# Altium PCB BOCD_1_02_Daughter_NBP2.PcbDoc (part 1 of 2)
Units mil, origin at the board's own origin, x right, y up, seen from the top; angles counter-clockwise.
Board outline 2716.51 x 3188.78 mil, 2 copper layers (Top Layer, Bottom Layer); 52 components, 189 nets, 558 pads, 192 vias.
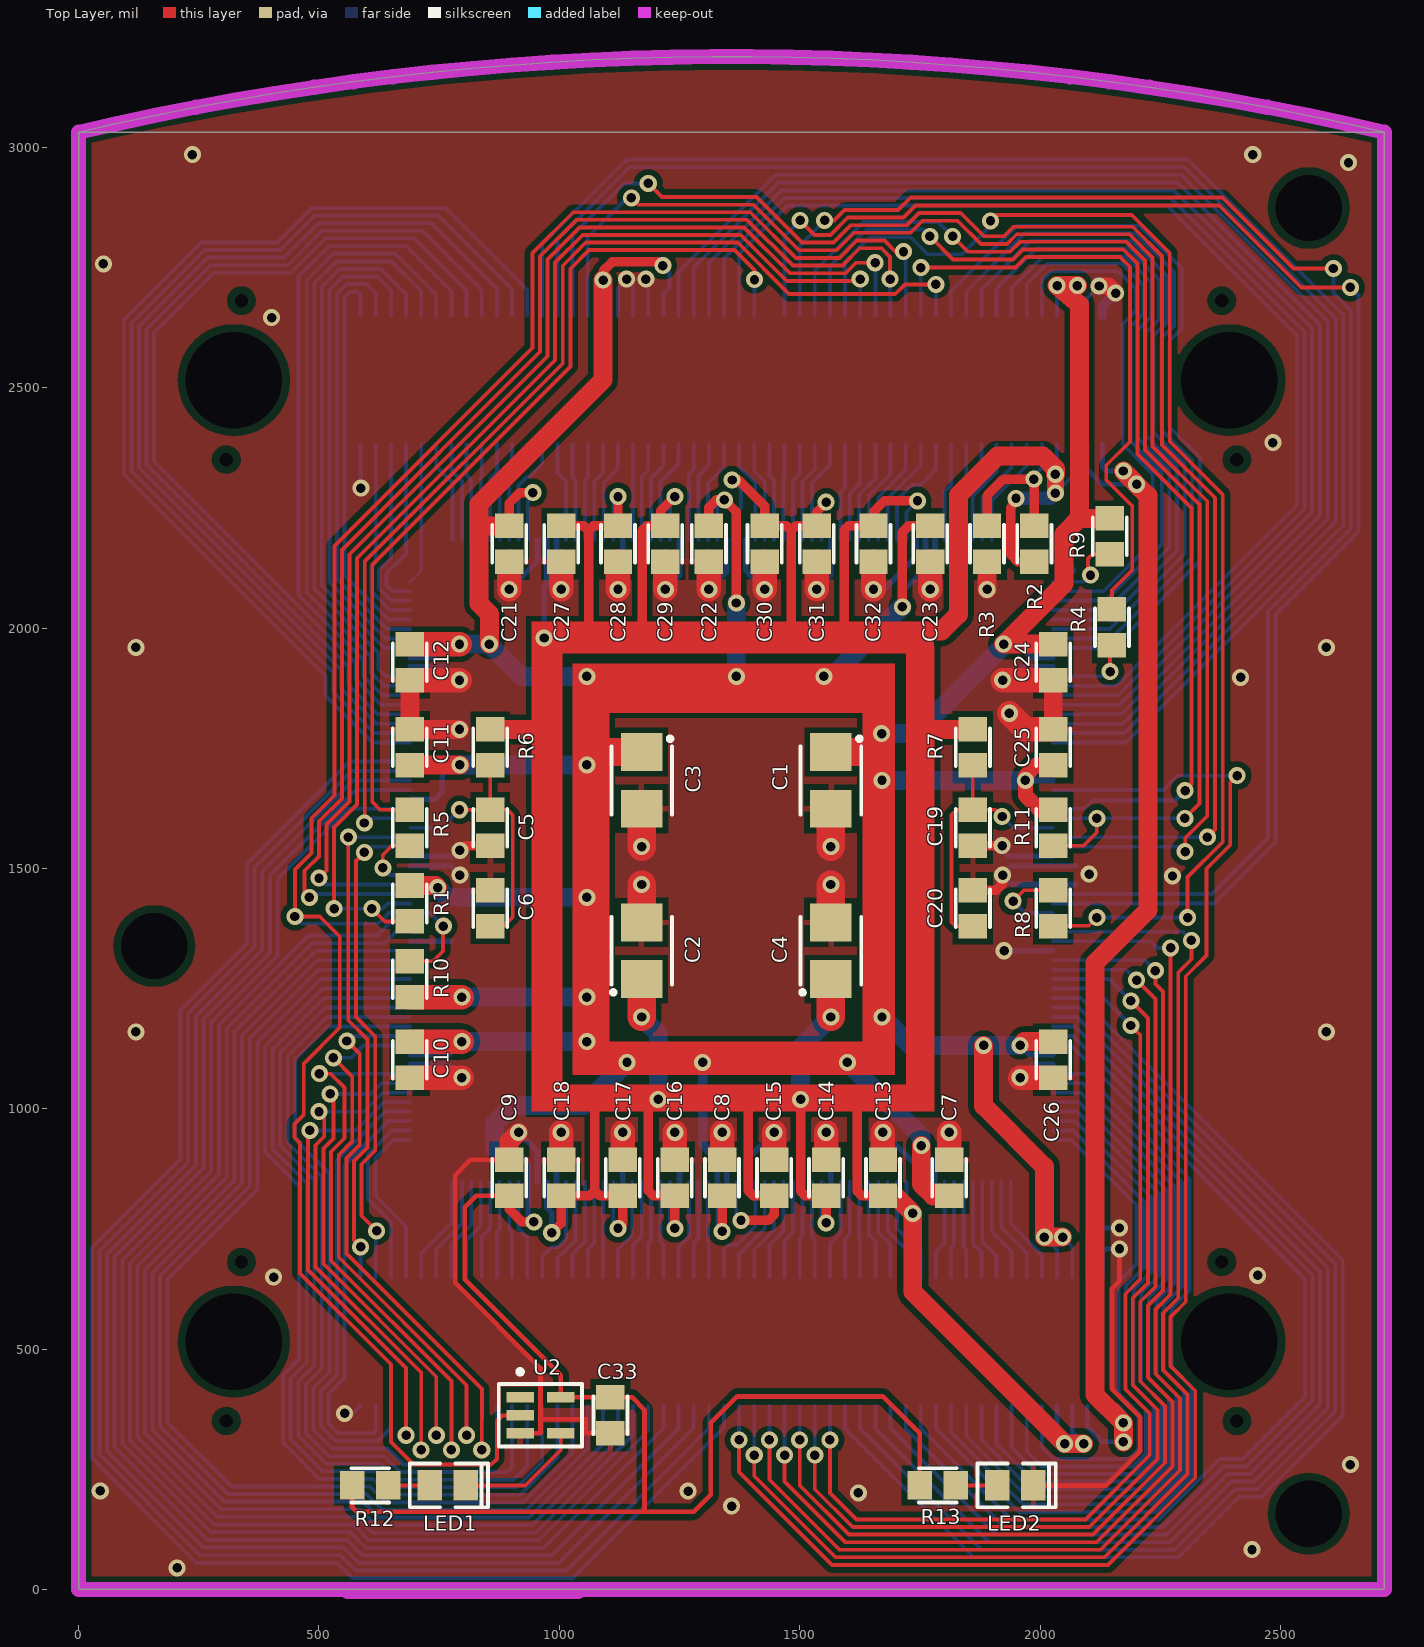
[diagram p0: Top Layer view]
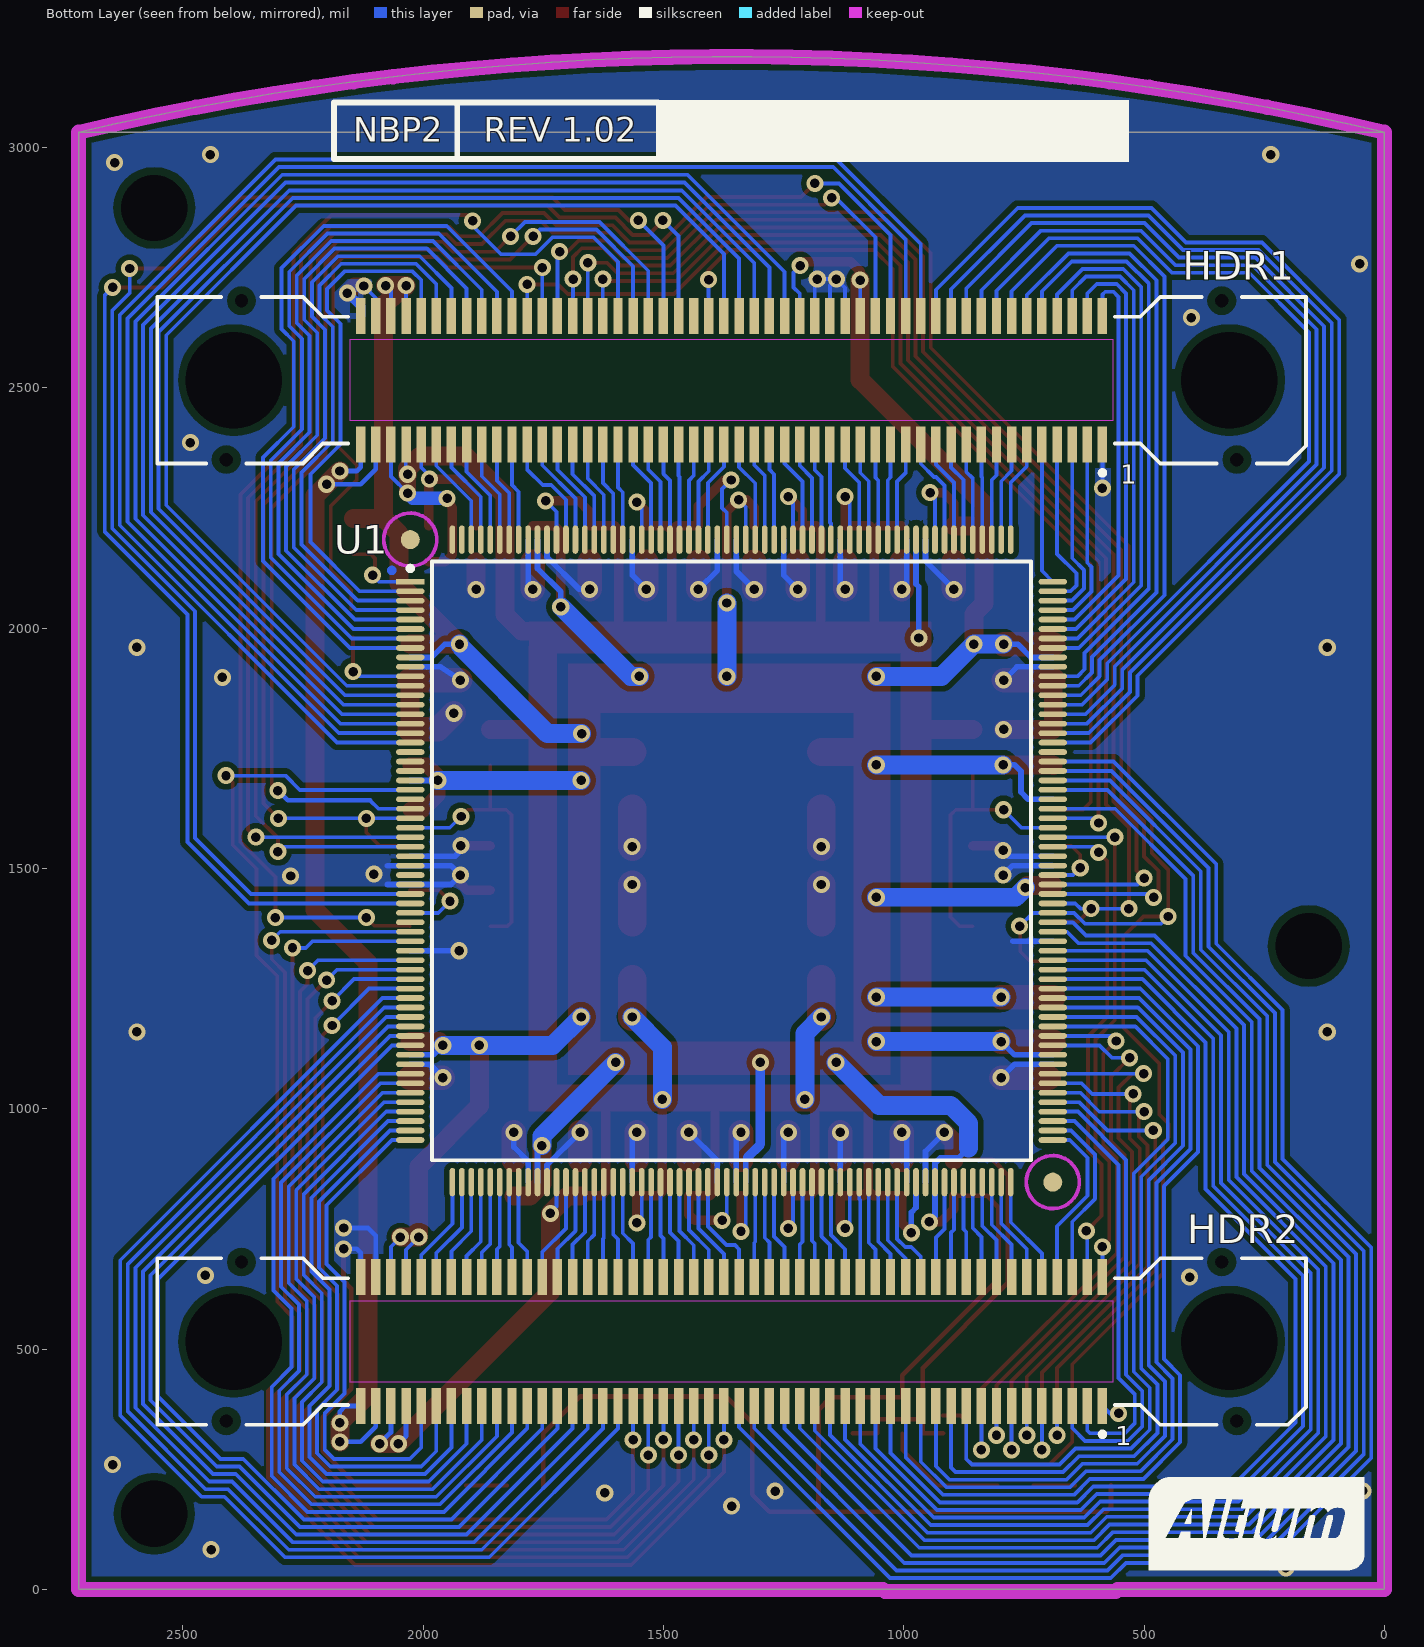
[diagram p1: Bottom Layer view, seen from below]

## Layer stack, top to bottom
Top Layer: signal copper 1.4
Dielectric: core 12.6, FR-4, Dk 4.8
Bottom Layer: signal copper 1.4

## Board outline
0.01,0.01 0.01,3031.49 ccw(c0.02,3031.5) 0.03,3031.48 cw(c1358.27,-2748.05) 0.03,3031.48 2716.52,3031.48 2716.52,0.01

## Design rules (kind name [scope] priority, off if disabled: settings)
Clearance Clearance_Unplated_Pads [PadIsPlated = 'False'] p1: gap=15.75 // Slightly larger clearance around unplated holes
Clearance Clearance_Polygons [InPolygon] p2: gap=11.81
Clearance [All] p3: gap=7.87
ComponentClearance [All] p1: gap=7.87 collisioncheckmode=3 verticalgap=10 showdistances=FALSE
FabricationTestPointUsage TestPointUsage [All] p1 off: valid=0 allowmultiple=FALSE
FabricationTestpoint Testpoint [All] p1 off: side=3 testpointundercomponent=TRUE minsize=40 maxsize=100 preferedsize=60 minholesize=0 maxholesize=40 preferedholesize=32 testpointgrid=1 allowsidetop=TRUE allowsidebottom=TRUE usegrid=TRUE gridtolerance=0.01
HoleSize [All] p1: absolutevalues=TRUE maxlimit=204.72 minlimit=15.75 maxpercent=80.000 minpercent=20.000
PlaneClearance [All] p1: clearance=19.68
PlaneConnect [All] p1: planeconnectstyle=Relief reliefexpansion=19.68 reliefentries=4 reliefconductorwidth=9.84 reliefairgap=9.84
PolygonConnect PolygonConnect_Satellite_ID_Pads [InPadClass('Satellite ID Pads')] p1: connectstyle=NoConnect reliefconductorwidth=10 reliefentries=4 polygonreliefangle="90 Angle"
PolygonConnect [All] p2: connectstyle=Relief reliefconductorwidth=11.81 reliefentries=4 polygonreliefangle="90 Angle"
RoomDefinition BOCD_CycloneEPC12 [InComponentClass('BOCD_CycloneEPC12')] p1 off: confinementstyle=ConfineIn formatcopy=TRUE lockcomponents=FALSE outline 0,0 2716.54,0 2716.54,3031.5 0,3031.5
RoutingVias [All] p1: holewidth=19.68 width=35.43 viastyle="Through Hole" minholewidth=19.68 minwidth=35.43 maxholewidth=19.68 maxwidth=35.43
SilkscreenOverComponentPads [All] p1: minsilkscreentomaskgap=10
SolderMaskExpansion SolderMaskExpansion_Vias [Isvia] p1: expansion=-18.11
SolderMaskExpansion [All] p2: expansion=3.94
Width Width_Power_Nets [InNetClass('Power Nets')] p1: maxlimit=98.43 minlimit=5.91 preferedwidth=9.84 toplayer_prefwidth=5.91
Width [All] p2: maxlimit=59.06 minlimit=7.87 preferedwidth=7.87
21 further rules are at their usual default settings.

## Classes and differential pairs
net class "Power Nets": 5V GND VCC VCCINT
pad class "Satellite ID Pads": HDR1-36 HDR1-38 HDR1-40

## Components (designator, comment, footprint, x,y, rotation, side; value= is the part's Value field where it differs from the comment)
C1 "10uF" MCCT-B 1564.96,1683.07 r270 top
C2 "10uF" MCCT-B 1171.26,1328.74 r90 top
C3 "10uF" MCCT-B 1171.26,1683.07 r270 top
C4 "10uF" MCCT-B 1564.96,1328.74 r90 top
C5 "0.1uF" CC2012-0805 856.3,1584.65 r270 top
C6 "0.001uF" CC2012-0805 856.3,1417.32 r90 top
C7 "0.1uF" CC2012-0805 1811.02,856.3 r90 top
C8 "0.1uF" CC2012-0805 1338.58,856.3 r90 top
C9 "0.1uF" CC2012-0805 895.67,856.3 r90 top
C10 "0.1uF" CC2012-0805 688.98,1102.36 r270 top
C11 "0.1uF" CC2012-0805 688.98,1751.97 r90 top
C12 "0.1uF" CC2012-0805 688.98,1929.13 r270 top
C13 "0.1uF" CC2012-0805 1673.23,856.3 r90 top
C14 "0.1uF" CC2012-0805 1555.12,856.3 r90 top
C15 "0.1uF" CC2012-0805 1446.85,856.3 r90 top
C16 "0.1uF" CC2012-0805 1240.16,856.3 r90 top
C17 "0.1uF" CC2012-0805 1131.89,856.3 r90 top
C18 "0.1uF" CC2012-0805 1003.94,856.3 r90 top
C19 "0.1uF" CC2012-0805 1860.24,1584.65 r90 top
C20 "0.001uF" CC2012-0805 1860.24,1417.32 r270 top
C21 "0.1uF" CC2012-0805 895.67,2175.2 r90 top
C22 "0.1uF" CC2012-0805 1311.02,2175.2 r90 top
C23 "0.1uF" CC2012-0805 1771.65,2175.2 r90 top
C24 "0.1uF" CC2012-0805 2027.56,1929.13 r90 top
C25 "0.1uF" CC2012-0805 2027.56,1751.97 r270 top
C26 "0.1uF" CC2012-0805 2027.56,1102.36 r90 top
C27 "0.1uF" CC2012-0805 1003.94,2175.2 r90 top
C28 "0.1uF" CC2012-0805 1122.05,2175.2 r90 top
C29 "0.1uF" CC2012-0805 1220.47,2175.2 r90 top
C30 "0.1uF" CC2012-0805 1427.17,2175.2 r90 top
C31 "0.1uF" CC2012-0805 1535.43,2175.2 r90 top
C32 "0.1uF" CC2012-0805 1653.54,2175.2 r90 top
C33 "0.1uF" CC2012-0805 1106.3,362.2 r270 top
HDR1 "54075-1009" 54075 1358.27,2515.75 r0 bottom locked
HDR2 "54075-1009" 54075 1358.27,515.75 r0 bottom locked
LED1 "HSMG-C170" "SMD _LED" 767.72,216.54 r180 top locked
LED2 "HSMH-C170" "SMD _LED" 1948.82,216.54 r180 top locked
R1 "4K7" CC2012-0805 688.98,1427.17 r270 top
R2 "DO NOT INSTALL" CC2012-0805 1988.19,2175.2 r90 top
R3 "47R" CC2012-0805 1889.76,2175.2 r270 top
R4 "100R" CC2012-0805 2149.61,2001.97 r90 top
R5 "100R" CC2012-0805 688.98,1584.65 r270 top
R6 "1R" CC2012-0805 856.3,1751.97 r270 top
R7 "1R" CC2012-0805 1860.24,1751.97 r270 top
R8 "33R" CC2012-0805 2027.56,1417.32 r270 top
R9 "4K7" CC2012-0805 2145,2191 r270 top
R10 "4K7" CC2012-0805 688.98,1269.69 r90 top
R11 "4K7" CC2012-0805 2027.56,1584.65 r270 top
R12 "270R" CC2012-0805 606.3,216.54 r0 top
R13 "270R" CC2012-0805 1787.4,216.54 r0 top
U1 "Cyclone EP1C12Q240C8" F-QFP32X32-G240/P.5N(RS) 1358.27,1515.75 r180 bottom locked
U2 "SN74LVC1G04DBV" SO-G5/P.95 960.63,362.2 r270 top

## Footprints (in the part's own frame and the unit in brackets; to place one, negate y for a bottom-side part, rotate by r counter-clockwise, add the part's x,y. Pads: shape width x height; smd on the part's side, far side on the other; paste and mask are expansions set on the pad)
54075 [mm] "Connector; Docking Station, Receptacle; 100 Position; Vertical"
  rect 0.5x1.9 smd: 1(-19.6,3.4) 2(-19.6,-3.4) 3(-18.8,3.4) 4(-18.8,-3.4) 5(-18,3.4) 6(-18,-3.4) 7(-17.2,3.4) 8(-17.2,-3.4) 9(-16.4,3.4) 10(-16.4,-3.4) 11(-15.6,3.4) 12(-15.6,-3.4) 13(-14.8,3.4) 14(-14.8,-3.4) 15(-14,3.4) 16(-14,-3.4) 17(-13.2,3.4) 18(-13.2,-3.4) 19(-12.4,3.4) 20(-12.4,-3.4) 21(-11.6,3.4) 22(-11.6,-3.4) 23(-10.8,3.4) 24(-10.8,-3.4) 25(-10,3.4) 26(-10,-3.4) 27(-9.2,3.4) 28(-9.2,-3.4) 29(-8.4,3.4) 30(-8.4,-3.4) 31(-7.6,3.4) 32(-7.6,-3.4) 33(-6.8,3.4) 34(-6.8,-3.4) 35(-6,3.4) 36(-6,-3.4) 37(-5.2,3.4) 38(-5.2,-3.4) 39(-4.4,3.4) 40(-4.4,-3.4) 41(-3.6,3.4) 42(-3.6,-3.4) 43(-2.8,3.4) 44(-2.8,-3.4) 45(-2,3.4) 46(-2,-3.4) 47(-1.2,3.4) 48(-1.2,-3.4) 49(-0.4,3.4) 50(-0.4,-3.4) 51(0.4,3.4) 52(0.4,-3.4) 53(1.2,3.4) 54(1.2,-3.4) 55(2,3.4) 56(2,-3.4) 57(2.8,3.4) 58(2.8,-3.4) 59(3.6,3.4) 60(3.6,-3.4) 61(4.4,3.4) 62(4.4,-3.4) 63(5.2,3.4) 64(5.2,-3.4) 65(6,3.4) 66(6,-3.4) 67(6.8,3.4) 68(6.8,-3.4) 69(7.6,3.4) 70(7.6,-3.4) 71(8.4,3.4) 72(8.4,-3.4) 73(9.2,3.4) 74(9.2,-3.4) 75(10,3.4) 76(10,-3.4) 77(10.8,3.4) 78(10.8,-3.4) 79(11.6,3.4) 80(11.6,-3.4) 81(12.4,3.4) 82(12.4,-3.4) 83(13.2,3.4) 84(13.2,-3.4) 85(14,3.4) 86(14,-3.4) 87(14.8,3.4) 88(14.8,-3.4) 89(15.6,3.4) 90(15.6,-3.4) 91(16.4,3.4) 92(16.4,-3.4) 93(17.2,3.4) 94(17.2,-3.4) 95(18,3.4) 96(18,-3.4) 97(18.8,3.4) 98(18.8,-3.4) 99(19.6,3.4) 100(19.6,-3.4)
  round 0.5 hole 0.7 unplated: MH1(-26.7,4.2) MH2(-25.9,-4.2) MH3(26.7,4.2) MH4(25.9,-4.2)
  round 4.8 hole 5.1 unplated: MH5(-26.3,0) MH6(26.3,0)
  Top Layer keep-out region: -20.15,2.15 20.15,2.15 20.15,-2.15 -20.15,-2.15
  silkscreen extent -30.35,-4.4 30.35,5.02
CC2012-0805 [mm]
  rect 1.3x1.5 smd: 1(-0.95,0) 2(0.95,0)
  silkscreen extent -1,-0.9 1,0.9
F-QFP32X32-G240/P.5N(RS) [mm]
  rect 1.5x0.3 smd: 1(-16.975,14.75)
  oval 1.5x0.3 smd: 2(-16.975,14.25) 3(-16.975,13.75) 4(-16.975,13.25) 5(-16.975,12.75) 6(-16.975,12.25) 7(-16.975,11.75) 8(-16.975,11.25) 9(-16.975,10.75) 10(-16.975,10.25) 11(-16.975,9.75) 12(-16.975,9.25) 13(-16.975,8.75) 14(-16.975,8.25) 15(-16.975,7.75) 16(-16.975,7.25) 17(-16.975,6.75) 18(-16.975,6.25) 19(-16.975,5.75) 20(-16.975,5.25) 21(-16.975,4.75) 22(-16.975,4.25) 23(-16.975,3.75) 24(-16.975,3.25) 25(-16.975,2.75) 26(-16.975,2.25) 27(-16.975,1.75) 28(-16.975,1.25) 29(-16.975,0.75) 30(-16.975,0.25) 31(-16.975,-0.25) 32(-16.975,-0.75) 33(-16.975,-1.25) 34(-16.975,-1.75) 35(-16.975,-2.25) 36(-16.975,-2.75) 37(-16.975,-3.25) 38(-16.975,-3.75) 39(-16.975,-4.25) 40(-16.975,-4.75) 41(-16.975,-5.25) 42(-16.975,-5.75) 43(-16.975,-6.25) 44(-16.975,-6.75) 45(-16.975,-7.25) 46(-16.975,-7.75) 47(-16.975,-8.25) 48(-16.975,-8.75) 49(-16.975,-9.25) 50(-16.975,-9.75) 51(-16.975,-10.25) 52(-16.975,-10.75) 53(-16.975,-11.25) 54(-16.975,-11.75) 55(-16.975,-12.25) 56(-16.975,-12.75) 57(-16.975,-13.25) 58(-16.975,-13.75) 59(-16.975,-14.25) 60(-16.975,-14.75) 121(16.975,-14.75) 122(16.975,-14.25) 123(16.975,-13.75) 124(16.975,-13.25) 125(16.975,-12.75) 126(16.975,-12.25) 127(16.975,-11.75) 128(16.975,-11.25) 129(16.975,-10.75) 130(16.975,-10.25) 131(16.975,-9.75) 132(16.975,-9.25) 133(16.975,-8.75) 134(16.975,-8.25) 135(16.975,-7.75) 136(16.975,-7.25) 137(16.975,-6.75) 138(16.975,-6.25) 139(16.975,-5.75) 140(16.975,-5.25) 141(16.975,-4.75) 142(16.975,-4.25) 143(16.975,-3.75) 144(16.975,-3.25) 145(16.975,-2.75) 146(16.975,-2.25) 147(16.975,-1.75) 148(16.975,-1.25) 149(16.975,-0.75) 150(16.975,-0.25) 151(16.975,0.25) 152(16.975,0.75) 153(16.975,1.25) 154(16.975,1.75) 155(16.975,2.25) 156(16.975,2.75) 157(16.975,3.25) 158(16.975,3.75) 159(16.975,4.25) 160(16.975,4.75) 161(16.975,5.25) 162(16.975,5.75) 163(16.975,6.25) 164(16.975,6.75) 165(16.975,7.25) 166(16.975,7.75) 167(16.975,8.25) 168(16.975,8.75) 169(16.975,9.25) 170(16.975,9.75) 171(16.975,10.25) 172(16.975,10.75) 173(16.975,11.25) 174(16.975,11.75) 175(16.975,12.25) 176(16.975,12.75) 177(16.975,13.25) 178(16.975,13.75) 179(16.975,14.25) 180(16.975,14.75)
  oval 0.3x1.5 smd: 61(-14.75,-16.975) 62(-14.25,-16.975) 63(-13.75,-16.975) 64(-13.25,-16.975) 65(-12.75,-16.975) 66(-12.25,-16.975) 67(-11.75,-16.975) 68(-11.25,-16.975) 69(-10.75,-16.975) 70(-10.25,-16.975) 71(-9.75,-16.975) 72(-9.25,-16.975) 73(-8.75,-16.975) 74(-8.25,-16.975) 75(-7.75,-16.975) 76(-7.25,-16.975) 77(-6.75,-16.975) 78(-6.25,-16.975) 79(-5.75,-16.975) 80(-5.25,-16.975) 81(-4.75,-16.975) 82(-4.25,-16.975) 83(-3.75,-16.975) 84(-3.25,-16.975) 85(-2.75,-16.975) 86(-2.25,-16.975) 87(-1.75,-16.975) 88(-1.25,-16.975) 89(-0.75,-16.975) 90(-0.25,-16.975) 91(0.25,-16.975) 92(0.75,-16.975) 93(1.25,-16.975) 94(1.75,-16.975) 95(2.25,-16.975) 96(2.75,-16.975) 97(3.25,-16.975) 98(3.75,-16.975) 99(4.25,-16.975) 100(4.75,-16.975) 101(5.25,-16.975) 102(5.75,-16.975) 103(6.25,-16.975) 104(6.75,-16.975) 105(7.25,-16.975) 106(7.75,-16.975) 107(8.25,-16.975) 108(8.75,-16.975) 109(9.25,-16.975) 110(9.75,-16.975) 111(10.25,-16.975) 112(10.75,-16.975) 113(11.25,-16.975) 114(11.75,-16.975) 115(12.25,-16.975) 116(12.75,-16.975) 117(13.25,-16.975) 118(13.75,-16.975) 119(14.25,-16.975) 120(14.75,-16.975) 181(14.75,16.975) 182(14.25,16.975) 183(13.75,16.975) 184(13.25,16.975) 185(12.75,16.975) 186(12.25,16.975) 187(11.75,16.975) 188(11.25,16.975) 189(10.75,16.975) 190(10.25,16.975) 191(9.75,16.975) 192(9.25,16.975) 193(8.75,16.975) 194(8.25,16.975) 195(7.75,16.975) 196(7.25,16.975) 197(6.75,16.975) 198(6.25,16.975) 199(5.75,16.975) 200(5.25,16.975) 201(4.75,16.975) 202(4.25,16.975) 203(3.75,16.975) 204(3.25,16.975) 205(2.75,16.975) 206(2.25,16.975) 207(1.75,16.975) 208(1.25,16.975) 209(0.75,16.975) 210(0.25,16.975) 211(-0.25,16.975) 212(-0.75,16.975) 213(-1.25,16.975) 214(-1.75,16.975) 215(-2.25,16.975) 216(-2.75,16.975) 217(-3.25,16.975) 218(-3.75,16.975) 219(-4.25,16.975) 220(-4.75,16.975) 221(-5.25,16.975) 222(-5.75,16.975) 223(-6.25,16.975) 224(-6.75,16.975) 225(-7.25,16.975) 226(-7.75,16.975) 227(-8.25,16.975) 228(-8.75,16.975) 229(-9.25,16.975) 230(-9.75,16.975) 231(-10.25,16.975) 232(-10.75,16.975) 233(-11.25,16.975) 234(-11.75,16.975) 235(-12.25,16.975) 236(-12.75,16.975) 237(-13.25,16.975) 238(-13.75,16.975) 239(-14.25,16.975) 240(-14.75,16.975)
  round 1 smd paste-0.51 mask+1: FID1(-16.975,16.975) FID2(16.975,-16.975)
  Top Layer circle w0.25: c-17.951,15.348 r0.125
  Top Layer keep-out circle w0.2: c16.975,-16.975 r1.4
  Top Layer keep-out circle w0.2: c-16.975,16.975 r1.4
  silkscreen extent -17.1,-15.83 15.83,15.83
MCCT-B [mm]
  rect 2x2.2 smd: 1(-1.5,0) 2(1.5,0)
  silkscreen extent -2.3,-1.6 1.8,1.6
"SMD _LED" [mm]
  rect 1.3x1.6 smd: 1(0.95,0) 2(-0.95,0)
  silkscreen extent -2.13,-1.15 2,1.15
SO-G5/P.95 [mm]
  rect 0.55x1.45 smd: 1(-0.95,-1.075) 2(0,-1.075) 3(0.95,-1.075) 4(0.95,1.075) 5(-0.95,1.075)
  silkscreen extent -2.42,-2.2 1.65,2.2

## Part data
C1 C2 C3 C4: library part CAP_POLAR, "Polar Capacitor"
C5 C6 C7 C8 C9 C10 C11 C12 C13 C14 C15 C16 C17 C18 C19 C20 C21 C22 C23 C24 C25 C26 C27 C28 C29 C30 C31 C32 C33: library part CAP, "Capacitor"
HDR1 HDR2: "Board-to-Board, Docking Station, 0.80mm (.031\") Pitch, Shielded Receptacle, Vertical, Ultra Low Profile, SMT"
LED1 LED2: library part HSMX-C670, "Typical RED GaAs SMD LED Agilent make"
R1 R2 R3 R4 R5 R6 R7 R8 R9 R10 R11 R12 R13: library part RES, "Resistor"
U1: library part EP1C12Q240C6_ALT, "Cyclone Family, 1.5V FPGA, 173 I/O Pins, 2 x PLLs, Commercial Grade, Speed Grade 6"
U2: library part SN74AHC1G04DBVR

## Free pads (board coordinates)
  round 125.98 hole 137.8 unplated: LP(157.48,1338.58) LP(2559.06,157.48) LP(2559.06,2874.02)

## Via types
v1: diameter 35.43, hole 19.68, Top Layer to Bottom Layer, 192 vias

## Nets (pads, with @x,y where several pads share a name; then routed paths per layer and width w, separated by ;. In a path a pad name is that pad's centre, name@x,y a point inside that pad or via, vN(x,y) a via of type N, cw(c..) or ccw(c..) an arc to the next point about the centre after c; other vN are vias at no path point)
5V: HDR1.97 HDR1.99 HDR2.97 HDR2.99 | length 2574.4
  Top Layer w39.37: v1(2173.23,307.09) v1(2173.23,346.46) 2114.17,405.51 2114.17,1303.15 2224.41,1413.39 2224.41,2275.59 v1(2173.23,2326.77)
  Bottom Layer w9.84: HDR2.97@2098.43,381.89 2098.43,338.58 2129.92,307.09 v1(2173.23,307.09) ; HDR1.97@2098.43,2381.89 2098.43,2330.71 2129.92,2299.21 v1(2200.79,2299.21) ; HDR2.99@2129.92,381.89 2161.42,381.89 2173.23,370.08 v1(2173.23,346.46) ; HDR1.99@2129.92,2381.89 2129.92,2334.64 2137.8,2326.77 v1(2173.23,2326.77)
AUDIO_SPI_CSN: HDR1.11 U1.181 | length 211.7
  Bottom Layer w7.87: HDR1.11@744.09,2381.89 744.09,2336.45 777.56,2302.98 U1.181@777.56,2184.06
BLUE0: HDR1.14 U1.168 | length 1436
  Bottom Layer w7.87: U1.168@689.96,1860.24 631.89,1860.24 592.52,1899.61 592.52,1933.44 457.68,2068.28 457.68,2731.3 521.65,2795.28 681.1,2795.28 775.59,2700.79 HDR1.14@775.59,2649.61
BLUE1: HDR1.16 U1.167 | length 1859.7
  Bottom Layer w7.87: U1.167@689.96,1840.55 628.94,1840.55 576.77,1892.72 576.77,1926.91 156.99,2346.69 156.99,2615.04 281.13,2739.17 441.93,2739.17 513.78,2811.02 697.83,2811.02 807.09,2701.77 HDR1.16@807.09,2649.61
BOC_CTS: HDR1.13 U1.182 | length 206.8
  Bottom Layer w7.87: HDR1.13@775.59,2381.89 775.59,2327.23 797.24,2305.57 U1.182@797.24,2184.06
BOC_RTS: HDR1.17 U1.184 | length 198.6
  Bottom Layer w7.87: U1.184@836.61,2184.06 836.61,2313.03 838.58,2315 HDR1.17@838.58,2381.89
BOC_RX: HDR1.19 U1.185 | length 203.5
  Bottom Layer w7.87: U1.185@856.3,2184.06 856.3,2311.22 870.08,2325 HDR1.19@870.08,2381.89
BOC_TX: HDR1.15 U1.183 | length 201.9
  Bottom Layer w7.87: HDR1.15@807.09,2381.89 807.09,2318 816.93,2308.16 U1.183@816.93,2184.06
BUZZER: HDR2.24 U1.113 | length 205.2
  Bottom Layer w7.87: U1.113@915.35,847.44 915.35,750 933.07,732.28 HDR2.24@933.07,649.61
CAN_RXD: HDR1.4 U1.175 | length 932.6
  Bottom Layer w7.87: HDR1.4@618.11,2649.61 618.11,2695.87 598.43,2715.55 557.09,2715.55 537.4,2695.87 537.4,2102.36 641.73,1998.03 U1.175@689.96,1998.03
CAN_TXD: HDR1.2 U1.176 | length 839.1
  Bottom Layer w7.87: HDR1.2@586.61,2649.61 586.61,2693.9 580.71,2699.8 563.98,2699.8 553.15,2688.98 553.15,2109.25 644.69,2017.72 U1.176@689.96,2017.72
FPGA_AUX0: HDR1.86 U1.5 | length 1376.3
  Bottom Layer w7.87: HDR1.86@1909.45,2649.61 1909.45,2706.69 1992.13,2789.37 2184.06,2789.37 2247.05,2726.38 2247.05,2641.43 2220,2614.38 2220,2401.19 2285,2336.19 2285,2161 2141.72,2017.72 U1.5@2026.57,2017.72
FPGA_AUX1: HDR1.88 U1.4 | length 1284.8
  Bottom Layer w7.87: HDR1.88@1940.95,2649.61 1940.95,2707.68 2006.89,2773.62 2177.17,2773.62 2231.3,2719.49 2231.3,2647.95 2204,2620.65 2204,2394.92 2269,2329.92 2269,2167.4 2139,2037.4 U1.4@2026.57,2037.4
FPGA_AUX2: HDR1.90 U1.3 | length 1197.1
  Bottom Layer w7.87: HDR1.90@1972.44,2649.61 1972.44,2715.55 2014.76,2757.87 2170.28,2757.87 2215.55,2712.6 2215.55,2654.48 2188,2626.93 2188,2388.65 2253,2323.64 2253,2174 2136.09,2057.09 U1.3@2026.57,2057.09
FPGA_AUX3: HDR1.92 U1.2 | length 1107.1
  Bottom Layer w7.87: HDR1.92@2003.94,2649.61 2003.94,2724.41 2021.65,2742.13 2163.39,2742.13 2199.8,2705.71 2199.8,2661 2172,2633.2 2172,2382.37 2234.29,2320.09 2234.29,2179.06 2132,2076.77 U1.2@2026.57,2076.77
FPGA_CCLK: HDR1.66 R8.2 | length 2641.1
  Top Layer w7.87: v1(1897,2847) 1909.32,2859.32 2190.68,2859.31 2269.69,2780.31 2269.69,2388 2380,2277.69 2380,1555 2307.09,1482.09 v1(2307.09,1397.64) ; R8.2@2027.56,1379.92 2028.54,1380.91 2101.38,1380.91 v1(2118.11,1397.64)
  Bottom Layer w7.87: HDR1.66@1594.49,2649.61 1594.49,2761.95 1645.57,2813.03 1731,2813.03 1766.18,2777.84 1838,2777.84 1897,2836.84 v1(1897,2847) ; v1(2118.11,1397.64) v1(2307.09,1397.64)
FPGA_CCLK#: R8.1 U1.36 | length 185.7
  Top Layer w7.87: v1(1944,1432) 1966.72,1454.72 R8.1@2027.56,1454.72
  Bottom Layer w7.87: v1(1944,1432) 1968.52,1407.48 U1.36@2026.57,1407.48
FPGA_CLK: HDR2.2 U1.153 | length 1078.3
  Top Layer w7.87: v1(561.02,1564.96) 561.02,1184.24 601,1144.27 601,919.46 572.75,891.21 572.75,726.46 v1(586.61,712.6)
  Bottom Layer w7.87: v1(561.02,1564.96) U1.153@689.96,1564.96 ; HDR2.2@586.61,649.61 v1(586.61,712.6)
FPGA_CLK_1: HDR1.30 U1.28 | length 3151.3
  Top Layer w7.87: v1(1185,2925) 1213.5,2896.5 1410.14,2896.5 1504.63,2802 1570.27,2802 1606.5,2838.23 1723.23,2838.23 1748.25,2863.25 1835.02,2863.25 1883.27,2815 1925,2815 1945,2835 2192.73,2835 2253.94,2773.79 2253.94,2381.06 2364,2271 2364,1581 v1(2348,1565)
  Bottom Layer w7.87: HDR1.30@1027.56,2649.61 1027.56,2817.66 1111.96,2902.06 1134.9,2925 v1(1185,2925) ; U1.28@2026.57,1564.96 v1(2348,1565) v1(2348,1565)
FPGA_CLK_2: HDR1.32 U1.29 | length 3073.8
  Top Layer w7.87: v1(1150,2895) 1164.25,2880.75 1403.61,2880.75 1498.36,2786 1576.54,2786 1613.02,2822.48 1730.48,2822.48 1755.5,2847.5 1828.5,2847.5 1877.19,2798.81 1931.08,2798.81 1951.52,2819.25 2186.21,2819.25 2234.25,2771.21 2234.25,2377.75 2348,2264 2348,1609 2302,1563 v1(2302,1535)
  Bottom Layer w7.87: HDR1.32@1059.05,2649.61 1059.05,2812.99 1141.06,2895 v1(1150,2895) ; U1.29@2026.57,1545.28 2291.72,1545.28 v1(2302,1535)
FPGA_DIN: HDR1.64 U1.25 | length 2260.2
  Top Layer w7.87: v1(1771,2815) 1819,2767 1943.81,2767 1964.57,2787.76 2173.16,2787.76 2202.76,2758.16 2202.76,2362.24 2315,2250 2315,1675 v1(2302,1662)
  Bottom Layer w7.87: HDR1.64@1562.99,2649.61 1562.99,2752.72 1639.32,2829.05 1756.95,2829.05 v1(1771,2815) ; U1.25@2026.57,1624.02 2092.52,1624.02 2110.15,1641.64
  Bottom Layer w9.06: 2110.15,1641.64 2281.64,1641.64 v1(2302,1662)
FPGA_DONE: HDR1.74 R10.2 U1.145 U2.2 | length 4717.3
  Top Layer w7.87: R10.2@688.98,1307.09 737.2,1307.09 757.87,1327.76 757.87,1378.94 v1(758.86,1379.92) ; U2.2@918.31,362.2 881.89,362.2 870.08,350.39 870.08,271.65 858.27,259.84 696.85,259.84 649.61,307.09 649.61,468.5 460.63,657.48 460.63,929.13 448.82,940.94 448.82,968.5 468.5,988.19 468.5,1094.49 543.31,1169.29 543.31,1358.27 501.57,1400 v1(450,1400) 450,1498 484.25,1532.25 484.25,1604.57 532.01,1652.32 532.01,2171.01 944.01,2583.01 944.01,2780.01 1029,2865 1397.09,2865 1492.09,2770 1582.81,2770 1618.81,2806 1676.27,2806 1699.27,2783 v1(1716,2783)
  Bottom Layer w7.87: v1(450,1400) 465,1385 623.19,1385 645.67,1407.48 731.3,1407.48 v1(758.86,1379.92) ; v1(1716,2783) 1720.47,2777.47 HDR1.74@1720.47,2649.61
FPGA_INIT: HDR1.68 R1.2 U1.146 | length 2565.8
  Top Layer w7.87: v1@531,1416 v1@531,1416.34 ; v1(531.5,1416.34) 531.5,1585 579.25,1632.76 579.25,2145.25 991.25,2557.25 991.25,2760.44 1048.57,2817.76 1377.52,2817.76 1473.28,2722 1622,2722 v1(1626,2726) ; v1(610.24,1416.34) 636.81,1389.76 R1.2@688.98,1389.76
  Bottom Layer w7.87: v1@531.34,1416.34 632.26,1416.34 643.08,1427.17 U1.146@689.96,1427.17 U1.146@688.98,1426.18 ; v1@609.9,1416 v1(610.24,1416.34) ; HDR1.68@1625.98,2649.61 v1(1626,2726)
FPGA_M0: HDR1.60 U1.34 | length 3126.5
  Top Layer w7.87: v1(1552,2848) 1571.73,2848 1593.45,2869.72 1704.72,2869.72 1731,2896 2379.59,2896 2527.56,2748.03 v1(2610.24,2748.03)
  Bottom Layer w7.87: HDR1.60@1500,2649.61 1500,2796 v1(1552,2848) ; U1.34@2026.57,1446.85 2357.85,1446.85 2474.25,1563.25 2474.25,2034.98 2646.65,2207.38 2646.65,2660.43 2610.24,2696.85 v1(2610.24,2748.03)
FPGA_M1: HDR1.58 U1.35 | length 3213.2
  Top Layer w7.87: v1(1501,2848) 1531,2818 1564,2818 1599.98,2853.98 1715.98,2853.98 1741,2879 2372.97,2879 2543.31,2708.66 v1(2645.67,2708.66)
  Bottom Layer w7.87: HDR1.58@1468.5,2649.61 1468.5,2815.5 v1(1501,2848) ; U1.35@2026.57,1427.17 2362.17,1427.17 2490,1555 2490,2028.46 2662.4,2200.86 2662.4,2691.93 v1(2645.67,2708.66)
FPGA_PROGRAM: HDR1.62 R11.2 U1.26 | length 2499.4
  Top Layer w7.87: v1(1818,2815) 1850,2783 1937.54,2783 1958.05,2803.5 2179.68,2803.5 2218.5,2764.68 2218.5,2370.5 2332,2257 2332,1635.15 v1(2301.18,1604.33) ; R11.2@2027.56,1547.24 2090.55,1547.24 2118.11,1574.8 v1(2118.11,1604.33)
  Bottom Layer w7.87: HDR1.62@1531.5,2649.61 1531.5,2743.5 1633,2845 1788,2845 v1(1818,2815) ; U1.26@2026.57,1604.33 v1(2118.11,1604.33) v1(2301.18,1604.33)
FPGA_TCK: HDR1.72 U1.147 | length 2702.1
  Top Layer w7.87: v1(480,1440) 470,1450 470,1495 500,1525 500,1598.05 547.76,1645.8 547.76,2162.76 959.76,2574.76 959.76,2773.48 1035.52,2849.25 1390.57,2849.25 1485.82,2754 1589.08,2754 1625.08,2790 1670,2790 1688,2772 v1(1688,2726)
  Bottom Layer w7.87: v1(480,1440) v1@486.85,1446.85 ; v1@481.85,1446.85 U1.147@689.96,1446.85 ; v1(1688,2726) HDR1.72@1688.98,2649.61
FPGA_TDI: HDR1.78 U1.155 | length 2344.2
  Top Layer w7.87: v1(594.49,1594.49) 595,1595 595,2138.27 1007,2550.27 1007,2753.92 1055.09,2802.01 1371,2802.01 1478.01,2695 1699,2695 1719,2715 v1(1783.47,2715)
  Bottom Layer w7.87: v1(594.49,1594.49) 604.33,1604.33 U1.155@689.96,1604.33 ; HDR1.78@1783.47,2649.61 v1(1783.47,2715)
FPGA_TDO: HDR1.54 R5.1 | length 1876.2
  Top Layer w7.87: R5.1@688.98,1622.05 626.95,1622.05 611,1638 611,2132 1023,2544 1023,2747.65 1061.61,2786.26 1364.48,2786.26 1406,2744.74 v1(1406,2725)
  Bottom Layer w7.87: HDR1.54@1405.51,2649.61 v1(1406,2725)
FPGA_TDO#: R5.2 U1.149 | length 154.6
  Top Layer w7.87: v1(632.87,1500.98) 632.87,1528.54 651.57,1547.24 R5.2@688.98,1547.24
  Bottom Layer w7.87: v1(632.87,1500.98) 647.64,1486.22 U1.149@689.96,1486.22
FPGA_TMS: HDR1.70 U1.148 | length 2547.8
  Top Layer w7.87: v1(500,1480) 515.75,1495.75 515.75,1591.52 563.5,1639.28 563.5,2153.5 975.5,2565.5 975.5,2766.96 1042.05,2833.5 1384.05,2833.5 1479.55,2738 1595.36,2738 1617.36,2760 v1(1657,2760)
  Bottom Layer w7.87: v1(500,1480) 513.46,1466.54 U1.148@689.96,1466.54 ; v1(1657,2760) 1657.48,2759.52 HDR1.70@1657.48,2649.61
GND: C1.2 C2.2 C3.2 C4.2 C5.2 C6.2 C7.2 C8.2 C9.2 C10.2 C11.2 C12.2 C13.2 C14.2 C15.2 C16.2 C17.2 C18.2 C19.1 C20.1 C21.1 C22.1 C23.1 C24.1 C25.1 C26.1 C27.1 C28.1 C29.1 C30.1 C31.1 C32.1 C33.2 HDR1.1 HDR1.36 HDR1.38 HDR1.40 HDR1.98 HDR1.100 HDR2.1 HDR2.98 HDR2.100 LED2.2 R3.2 U1.10 U1.30 U1.31 U1.33 U1.40 U1.52 U1.69 U1.71 U1.80 U1.89 U1.91 U1.96 U1.102 U1.109 U1.111 U1.129 U1.142 U1.150 U1.151 U1.171 U1.190 U1.192 U1.199 U1.205 U1.210 U1.212 U1.221 U1.230 U1.232 U2.3 | length 8279.7
  Top Layer w9.84: C9.2@895.67,893.7 814.96,893.7 783.46,862.2 783.46,637.8 960.63,460.63 960.63,324.8 U2.3@918.31,324.8 ; 960.63,354.33 1055.12,354.33 1055.12,324.8 C33.2@1106.3,324.8 ; LED2.2@1986.22,216.54 2137.8,216.54 2208.66,287.4 2208.66,358.27 2149.61,417.32 2149.61,625.98 2165.35,641.73 v1(2165.35,708.66)
  Top Layer w19.68: v1(793.3,1537.4) 803.15,1547.24 C5.2@856.3,1547.24 ; C20.1@1860.24,1454.72 1908.46,1454.72 1922.24,1468.5 v1(1922.24,1486.22) ; C19.1@1860.24,1547.24 v1(1921.26,1547.24)
  Top Layer w35.43: v1(2123.03,2711.61) 2142.72,2711.61 v1(2157.48,2696.85)
  Top Layer w39.37: C12.2@688.98,1891.73 C11.2@688.98,1789.37 v1(792.32,1789.36) ; C9.2@895.67,893.7 895.67,931.1 v1(915.35,950.79) ; v1(1889.76,2080.71) R3.2@1889.76,2137.8 ; C25.1@2027.56,1789.37 C24.1@2027.56,1891.73
  Top Layer w51.18: C12.2@688.98,1891.73 v1(792.32,1891.73) ; C10.2@698.82,1064.96 v1(797.24,1064.96) ; v1(895.67,2080.7) C21.1@895.67,2137.8 ; C18.2@1003.94,893.7 v1(1003.94,950.79) ; v1(1003.94,2080.71) C27.1@1003.94,2137.8 ; v1(1122.05,2080.71) C28.1@1122.05,2137.8 ; C17.2@1131.89,893.7 v1(1131.89,950.79) ; v1(1220.47,2080.71) C29.1@1220.47,2137.8 ; C16.2@1240.16,893.7 v1(1240.16,950.79) ; v1(1311.02,2080.71) C22.1@1311.02,2137.8 ; C8.2@1338.58,893.7 v1(1338.58,950.79) ; v1(1427.17,2080.71) C30.1@1427.17,2137.8 ; C15.2@1446.85,893.7 v1(1446.85,950.79) ; v1(1535.43,2080.71) C31.1@1535.43,2137.8 ; C14.2@1555.12,893.7 v1(1555.12,950.79) ; v1(1653.54,2080.71) C32.1@1653.54,2137.8 ; C13.2@1673.23,893.7 v1(1673.23,950.79) ; v1(1771.65,2080.71) C23.1@1771.65,2137.8 ; C7.2@1811.02,893.7 v1(1811.02,950.79) ; v1(1922.24,1891.73) C24.1@2027.56,1891.73 ; v1(1936.02,1822.83) 1969.49,1789.37 C25.1@2027.56,1789.37 ; v1(1958.66,1064.96) C26.1@2027.56,1064.96
  Top Layer w59.06: C2.2@1171.26,1387.8 v1(1171.26,1466.54) ; v1(1171.26,1545.28) C3.2@1171.26,1624.01 ; C4.2@1564.96,1387.8 v1(1564.96,1466.54) ; v1(1564.96,1545.28) C1.2@1564.96,1624.02
  Bottom Layer w7.87: v1(553.15,366.14) 570.87,366.14 HDR2.1@586.61,381.89 HDR2.1@583.66,384.84 ; HDR1.1@586.61,2381.89 586.61,2301.17 v1(587,2291) ; U1.150@689.96,1505.91 U1.150@690.94,1506.89 ; HDR1.36@1122.05,2649.61 1122.05,2708.1 v1(1140,2726.06) ; HDR1.38@1153.54,2649.61 1153.54,2712.51 v1(1140,2726.06) ; HDR1.40@1185.04,2649.61 1185.04,2721.02 v1(1180,2726.06) v1(1140,2726.06) ; HDR1.98@2098.43,2649.61 2098.43,2687.01 v1(2123.03,2711.61)
  Bottom Layer w9.84: HDR2.98@2098.43,649.61 2098.43,736.22 2114.17,751.97 v1(2165.35,751.97) ; HDR2.100@2129.92,649.61 2129.92,700.79 2137.8,708.66 v1(2165.35,708.66)
  Bottom Layer w11.81: U1.129@689.96,1092.52 769.68,1092.52 v1(797.24,1064.96) ; U1.142@689.96,1348.43 772.63,1348.43 ; U1.150@689.96,1505.91 773.62,1505.91 v1(793.3,1486.22) ; U1.151@689.96,1525.59 781.49,1525.59 v1(793.3,1537.4) ; U1.171@689.96,1919.29 764.76,1919.29 v1(792.32,1891.73) ; v1(895.67,2080.7) 954.72,2139.76 U1.190@954.72,2184.06 ; v1(915.35,950.79) 954.72,911.42 U1.111@954.72,847.44 ; U1.109@994.09,847.44 994.09,940.94 v1(1003.94,950.79) ; U1.192@994.09,2184.06 994.09,2090.55 v1(1003.94,2080.71) ; v1(1122.05,2080.71) 1131.89,2090.55 U1.199@1131.89,2184.06 ; U1.102@1131.89,847.44 v1(1131.89,950.79) ; v1(1220.47,2080.71) 1250,2110.24 U1.205@1250,2184.06 ; v1(1240.16,950.79) 1250,940.94 U1.96@1250,847.44 ; v1(1311.02,2080.71) 1348.43,2118.11 U1.210@1348.43,2184.06 ; v1(1338.58,950.79) 1348.43,940.94 U1.91@1348.43,847.44 ; U1.89@1387.8,847.44 1387.8,891.73 v1(1446.85,950.79) ; U1.212@1387.8,2184.06 1387.8,2120.08 v1(1427.17,2080.71) ; v1(1535.43,2080.71) 1564.96,2110.24 U1.221@1564.96,2184.06 ; v1(1555.12,950.79) 1564.96,940.94 U1.80@1564.96,847.44 ; v1(1653.54,2080.71) 1675.2,2080.71 1742.13,2147.64 U1.230@1742.13,2184.06 ; v1(1673.23,950.79) 1674.21,950.79 1742.13,882.87 U1.71@1742.13,847.44 ; v1(1771.65,2080.71) 1781.5,2090.55 U1.232@1781.5,2184.06 ; U1.69@1781.5,847.44 1781.5,890.74 1811.02,920.27 v1(1811.02,950.79) ; v1(1921.26,1547.24) 1921.26,1537.4 1933.07,1525.59 U1.30@2026.57,1525.59 ; v1(1922.24,1891.73) 1963.83,1919.29 U1.10@2026.57,1919.29 ; v1(1925.2,1328.74) U1.40@2026.57,1328.74 ; v1(1958.66,1064.96) 1986.22,1092.52 U1.52@2026.57,1092.52 ; 2073.82,1466.54 1941.93,1466.54 v1(1922.24,1486.22) 1941.93,1505.91 2073.82,1505.91
  Bottom Layer w19.68: HDR1.100@2129.92,2649.61 2129.92,2670.28 v1(2157.48,2696.85)
  other v1: 205,45 2440.94,82.68 1358.27,173.23 1622.05,200.79 45,205 1267.72,204.72 2645.67,259.84 405.51,649.6 2452.76,653.54 119,1160 2595.53,1160 2275.59,1484.25 2102.36,1488.19 2417.32,1897.63 119,1960 2595.53,1960 2484.25,2385.82 401.57,2645.66 51.54,2757.48 2641.73,2968.5 236.54,2985 2442.52,2985
GREEN0: HDR1.10 U1.170 | length 1248.1
  Bottom Layer w7.87: U1.170@689.96,1899.61 638.78,1899.61 624.02,1914.37 624.02,1948.2 490.16,2082.06 490.16,2716.54 536.42,2762.8 650.59,2762.8 712.6,2700.79 HDR1.10@712.6,2649.61
GREEN1: HDR1.12 U1.169 | length 1336.6
  Bottom Layer w7.87: U1.169@689.96,1879.92 635.83,1879.92 608.27,1907.48 608.27,1939.96 474.41,2073.82 474.41,2723.43 530.51,2779.53 657.48,2779.53 744.09,2692.91 HDR1.12@744.09,2649.61
HDRIVE: HDR1.18 U1.166 | length 1954.6
  Bottom Layer w7.87: U1.166@689.96,1820.87 622.05,1820.87 561.02,1881.89 561.02,1920.39 141.24,2340.17 141.24,2621.56 274.61,2754.92 435.04,2754.92 506.89,2826.77 714.57,2826.77 838.58,2702.76 HDR1.18@838.58,2649.61
INIT_DONE: R9.2 U1.1 | length 169.7
  Top Layer w7.87: v1(2105,2110) 2100,2115 2100,2145 2108.6,2153.6 R9.2@2145,2153.6
  Bottom Layer w7.87: U1.1@2026.57,2096.46 2091.46,2096.46 v1(2105,2110)
IO0: HDR2.7 U1.125 | length 1014.7
  Top Layer w7.87: v1(481,955) 477,951 477,664.73 681.1,460.63 v1(681.1,320.87)
  Bottom Layer w7.87: v1(481,955) 576.43,955 635.21,1013.78 U1.125@689.96,1013.78 ; v1(681.1,320.87) HDR2.7@681.1,381.89
IO1: HDR2.9 U1.126 | length 1104.5
  Top Layer w7.87: v1(500,994) 511,983 511,942 493,924 493,671 712.6,451.4 v1(712.6,290.35)
  Bottom Layer w7.87: v1(500,994) 593.16,994 632.62,1033.46 U1.126@689.96,1033.46 ; v1(712.6,290.35) HDR2.9@712.6,381.89
IO2: HDR2.11 U1.127 | length 1056.1
  Top Layer w7.87: v1(523,1031) 530,1024 530,938 509.15,917.15 509.15,677.58 744.09,442.64 v1(744.09,320.87)
  Bottom Layer w7.87: v1(523,1031) 607.89,1031 630.04,1053.15 U1.127@689.96,1053.15 ; v1(744.09,320.87) HDR2.11@744.09,381.89
IO3: HDR2.13 U1.128 | length 1216.6
  Top Layer w7.87: v1(501,1073) 524,1073 553,1044 553,938.73 525,910.73 525,684 775.59,433.41 v1@775.59,287.4
  Bottom Layer w7.87: v1(501,1073) 689.79,1073 U1.128@689.96,1072.83 ; v1(775.59,290.35) HDR2.13@775.59,381.89
IO4: HDR2.15 U1.131 | length 1155.8
  Top Layer w7.87: v1(530,1106) 569,1067 569,932 541,904 541,691 807.09,424.91 v1(807.09,320.87)
  Bottom Layer w7.87: v1(530,1106) 567,1106 592.89,1131.89 U1.131@689.96,1131.89 ; v1@807.09,321.85 v1(807.09,320.87) HDR2.15@807.09,381.89
IO5: HDR2.17 U1.132 | length 1218.1
  Top Layer w7.87: v1(558,1141) 585,1114 585,925.73 557,897.73 557,699 839,417 v1(838.58,290.35)
  Bottom Layer w7.87: v1(558,1141) 568.57,1151.57 U1.132@689.96,1151.57 ; v1(838.58,290.35) HDR2.17@838.58,381.89
IO6: HDR2.19 U1.133 | length 1608.9
  Bottom Layer w7.87: U1.133@689.96,1171.26 518.22,1171.26 450.79,1103.83 450.79,936 521.65,865.13 521.65,453.11 488.19,419.64 488.19,332.31 527.5,293 642.84,293 676,259.84 858.27,259.84 870.08,271.65 HDR2.19@870.08,381.89
IO7: HDR2.21 U1.134 | length 1711.3
  Bottom Layer w7.87: U1.134@689.96,1190.94 515.63,1190.94 435.04,1110.35 435.04,929.48 505.9,858.61 505.9,459.63 472.44,426.17 472.44,325.79 520.98,277.25 635.75,277.25 668.91,244.09 892.09,244.09 901.57,253.57 HDR2.21@901.57,381.89
IO8: HDR2.23 U1.135 | length 1801.5
  Bottom Layer w7.87: U1.135@689.96,1210.63 513.05,1210.63 419.29,1116.88 419.29,922.95 490.16,852.09 490.16,466.15 456.69,432.69 456.69,319.15 514.34,261.5 628.5,261.5 661.65,228.35 904.91,228.35 933.07,256.51 HDR2.23@933.07,381.89
IO9: HDR2.25 U1.136 | length 1887.9
  Bottom Layer w7.87: U1.136@689.96,1230.32 510.46,1230.32 403.54,1123.4 403.54,916.43 474.41,845.56 474.41,472.68 440.94,439.21 440.94,312.63 507.81,245.76 621.24,245.76 654.4,212.6 911.43,212.6 964.57,265.73 HDR2.25@964.57,381.89
IO10: HDR2.27 U1.137 | length 1974.3
  Bottom Layer w7.87: U1.137@689.96,1250 507.87,1250 387.8,1129.92 387.8,909.91 458.66,839.04 458.66,479.2 425.2,445.74 425.2,306.1 501.29,230.01 612.99,230.01 646.15,196.85 917.95,196.85 996.06,274.96 HDR2.27@996.06,381.89
IO11: HDR2.29 U1.138 | length 2292.6
  Bottom Layer w7.87: U1.138@689.96,1269.69 503.69,1269.69 372,1138 372,832.96 185.04,646 185.04,347 317.78,214.26 605.74,214.26 638.9,181.1 924.48,181.1 1027.56,284.18 HDR2.29@1027.56,381.89
IO12: HDR2.31 U1.139 | length 2380.5
  Bottom Layer w7.87: U1.139@689.96,1289.37 499.37,1289.37 356,1146 356,839.23 169.29,652.52 169.29,339.71 310.49,198.51 598.49,198.51 631.65,165.35 931,165.35 1059.05,293.41 HDR2.31@1059.05,381.89
IO13: HDR2.33 U1.140 | length 2467.8
  Bottom Layer w7.87: U1.140@689.96,1309.06 496.06,1309.06 340,1153 340,845.5 153.54,659.05 153.54,332.46 303.24,182.76 591.24,182.76 624.39,149.61 937.52,149.61 1090.55,302.64 HDR2.33@1090.55,381.89
IO14: HDR2.35 U1.141 | length 2555
  Bottom Layer w7.87: U1.141@689.96,1328.74 492.74,1328.74 324,1160 324,851.77 137.8,665.57 137.8,325.2 296,167 584.73,167 617.87,133.86 944.05,133.86 1122.05,311.86 HDR2.35@1122.05,381.89
IO15: HDR2.37 U1.143 | length 2650.5
  Bottom Layer w7.87: U1.143@689.96,1368.11 660.43,1368.11 636.81,1344.49 485.49,1344.49 308,1167 308,858.05 122.05,672.09 122.05,317.95 288.75,151.25 577.75,151.25 610.89,118.11 950.57,118.11 1153.54,321.09 HDR2.37@1153.54,381.89
IO16: HDR2.39 U1.144 | length 2737.8
  Bottom Layer w7.87: U1.144@689.96,1387.8 648.26,1387.8 620.7,1360.24 478.24,1360.24 292,1174 292,864.32 106.3,678.61 106.3,310.7 282,135 571.73,135 604.37,102.36 957.09,102.36 1185.04,330.31 HDR2.39@1185.04,381.89
IO17: HDR2.41 U1.156 | length 3010.2
  Bottom Layer w7.87: U1.156@689.96,1624.02 560.02,1624.02 414,1478 414,1318.27 276,1180.27 276,870.59 90.55,685.14 90.55,303.45 274.75,119.25 564.75,119.25 597.39,86.61 967.61,86.61 1216.54,335.54 HDR2.41@1216.54,381.89
IO18: HDR2.43 U1.158 | length 3111.4
  Bottom Layer w7.87: U1.158@689.96,1663.39 576.39,1663.39 398,1485 398,1324.54 260,1186.54 260,876.86 74.8,691.66 74.8,296.2 268,103 558.73,103 590.86,70.87 983.87,70.87 1248.03,335.03 HDR2.43@1248.03,381.89
IO19: HDR2.45 U1.159 | length 3205.5
  Bottom Layer w7.87: U1.159@689.96,1683.07 571.07,1683.07 382,1494 382,1330.81 244,1192.81 244,883.13 59.06,698.18 59.06,287.95 259.75,87.25 550.75,87.25 582.88,55.12 999,55.12 1279.53,335.65 HDR2.45@1279.53,381.89
IO20: HDR2.47 U1.160 | length 3298.3
  Bottom Layer w7.87: U1.160@689.96,1702.76 567.76,1702.76 366,1501 366,1337.08 228,1199.08 228,889.4 43.31,704.71 43.31,280.69 253,71 544.73,71 576.36,39.37 1015,39.37 1311.02,335.39 HDR2.47@1311.02,381.89
IO21: HDR2.49 U1.161 | length 3390.3
  Bottom Layer w7.87: U1.161@689.96,1722.44 563.44,1722.44 350,1509 350,1343.35 212,1205.35 212,895.67 27.56,711.23 27.56,273.44 245.75,55.25 537.75,55.25 569.38,23.62 1028.62,23.62 1342.52,337.52 HDR2.49@1342.52,381.89
IO22: HDR2.51 U1.23 | length 3176.5
  Top Layer w7.87: v1(1374.02,311.02) 1374.02,244.09 1566.93,51.18 2141.73,51.18 2322.83,232.28 2322.83,413.39 2271.65,464.57 2271.65,566.93 2303.15,598.43 2303.15,1275.59 2346.46,1318.9 2346.46,1499.19 2395.75,1548.48 2395.75,1678.75 v1(2410,1693)
  Bottom Layer w7.87: v1(1374.02,311.02) HDR2.51@1374.02,381.89 ; U1.23@2026.57,1663.39 2256.39,1663.39 2286,1693 v1(2410,1693)